# Altium PCB Layout.PcbDoc
Units mm, origin at the board's own origin, x right, y up, seen from the top; angles counter-clockwise.
Board outline 60 x 52.5 mm, 4 copper layers (Top Layer, Ground Layer, Power Layer, Bottom Layer), stack 1.591 mm thick; 44 components, 50 nets, 274 pads, 102 vias.
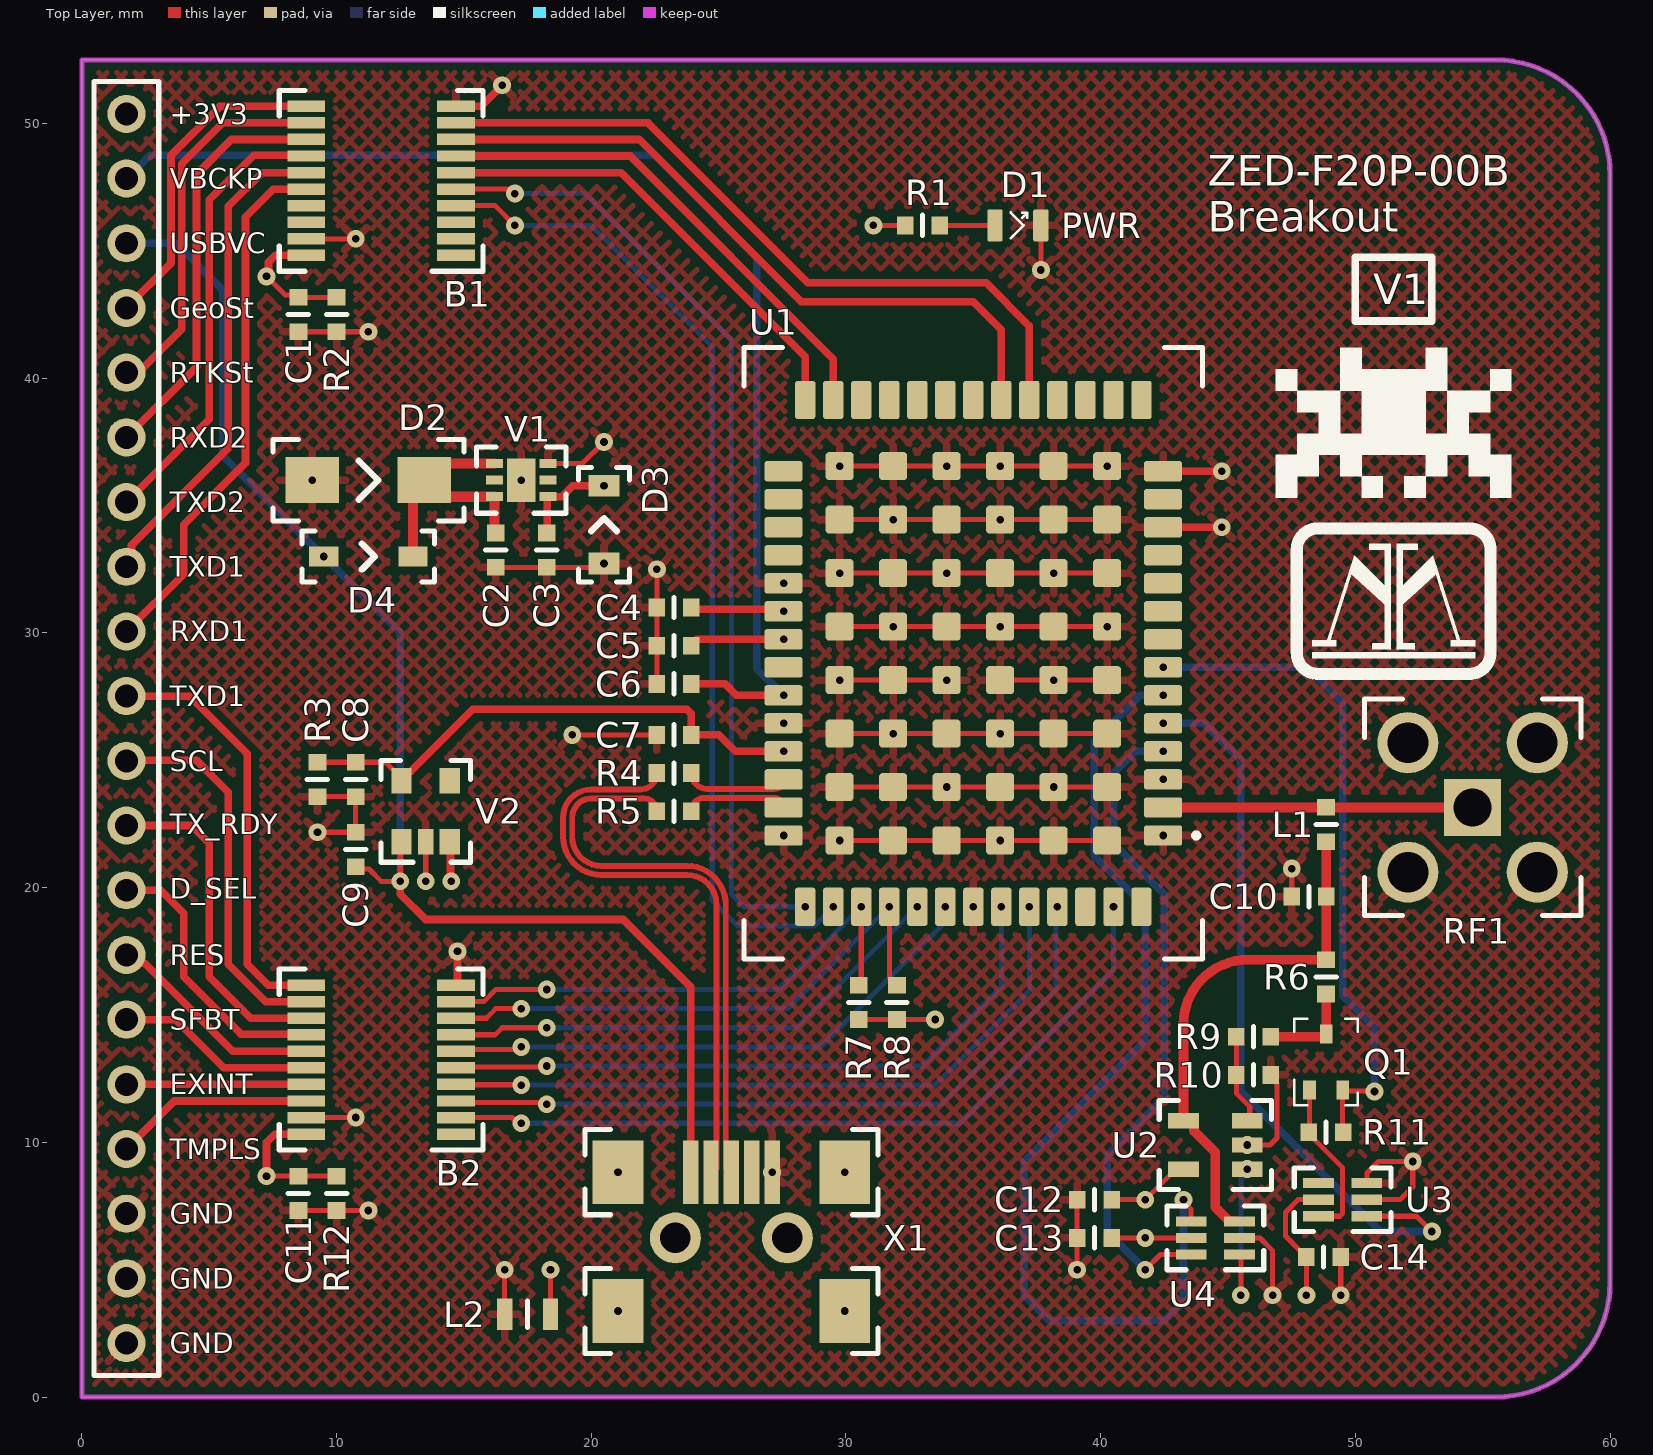
[diagram p0: Top Layer view]
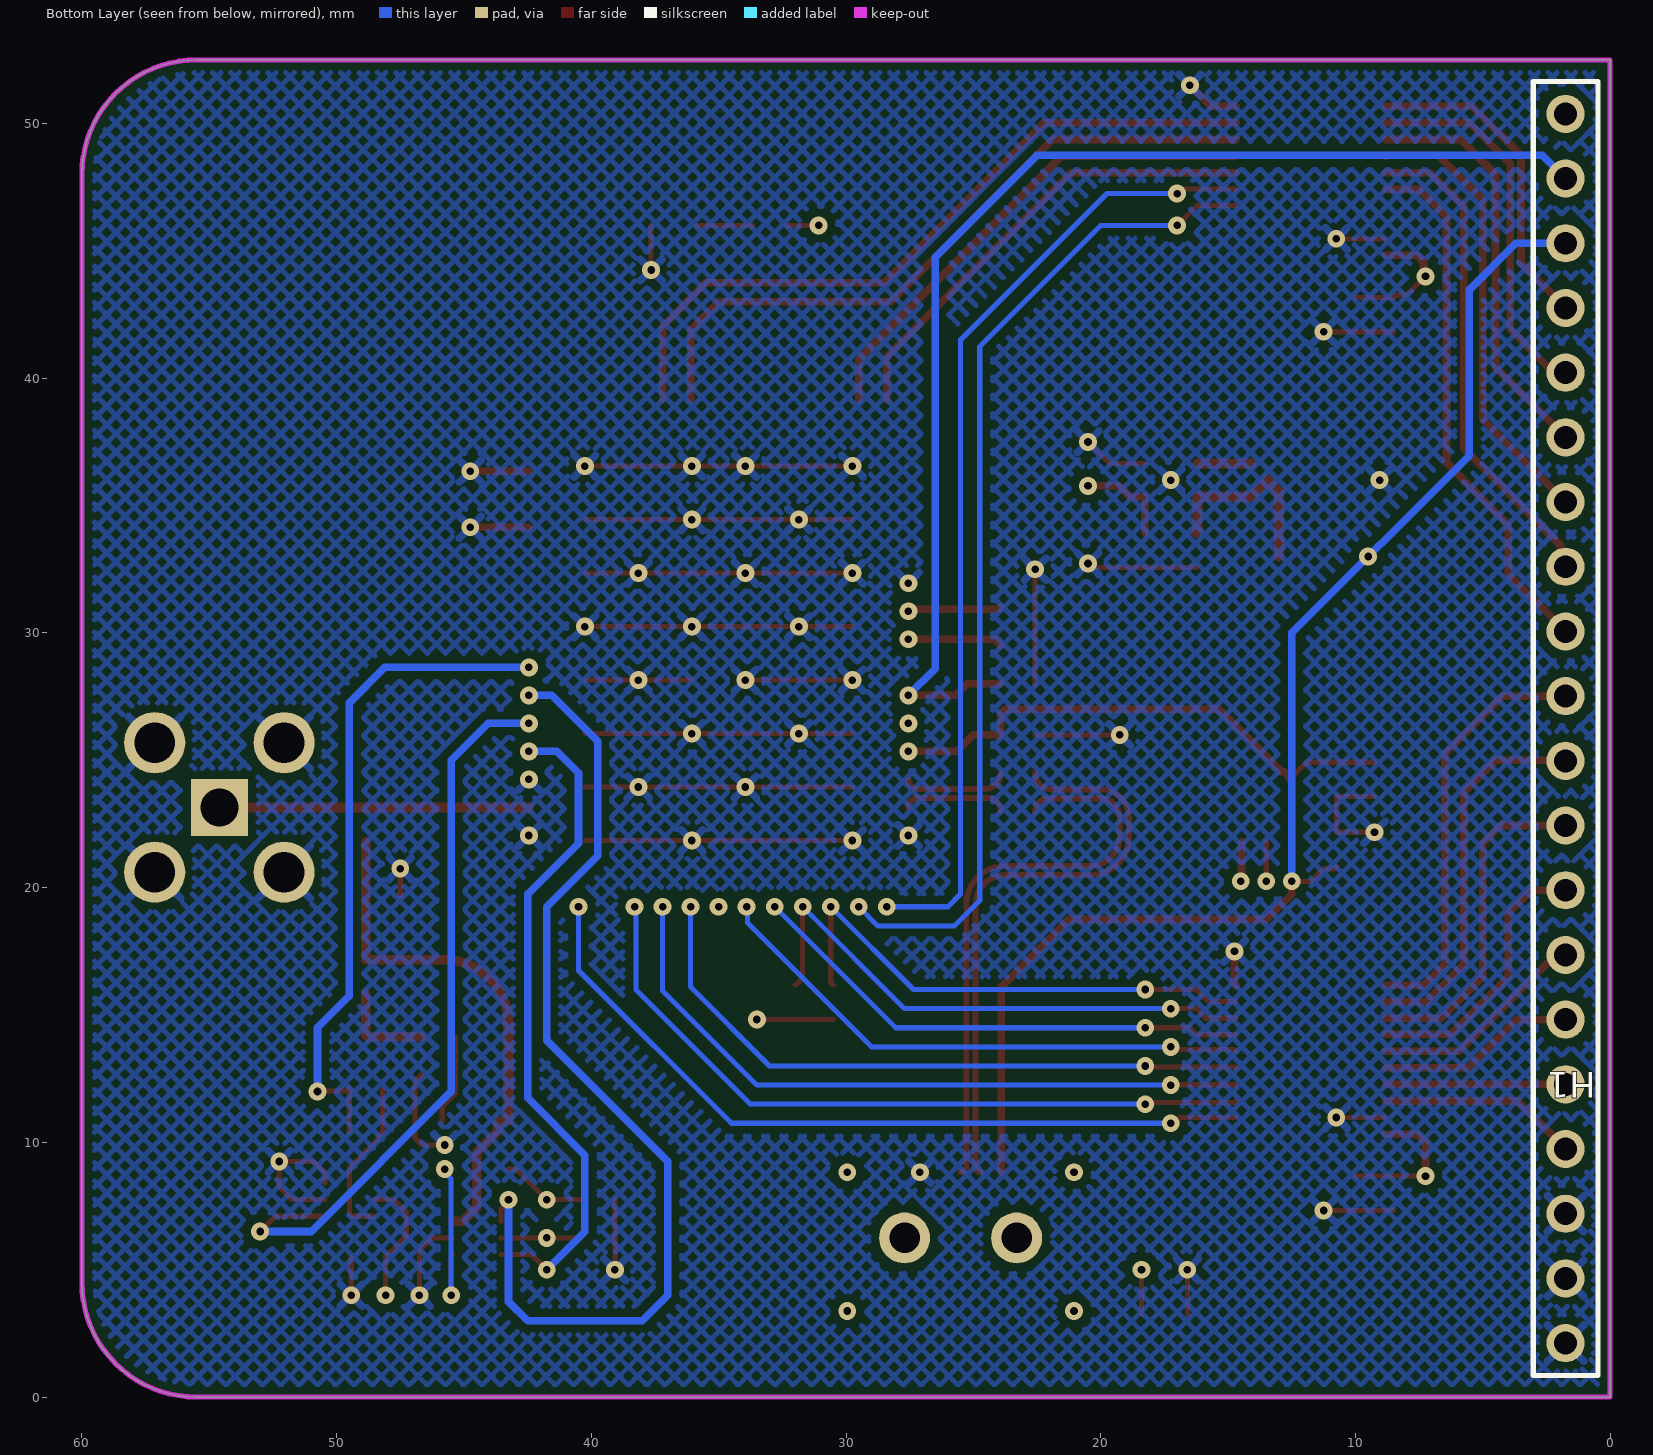
[diagram p1: Bottom Layer view, seen from below]
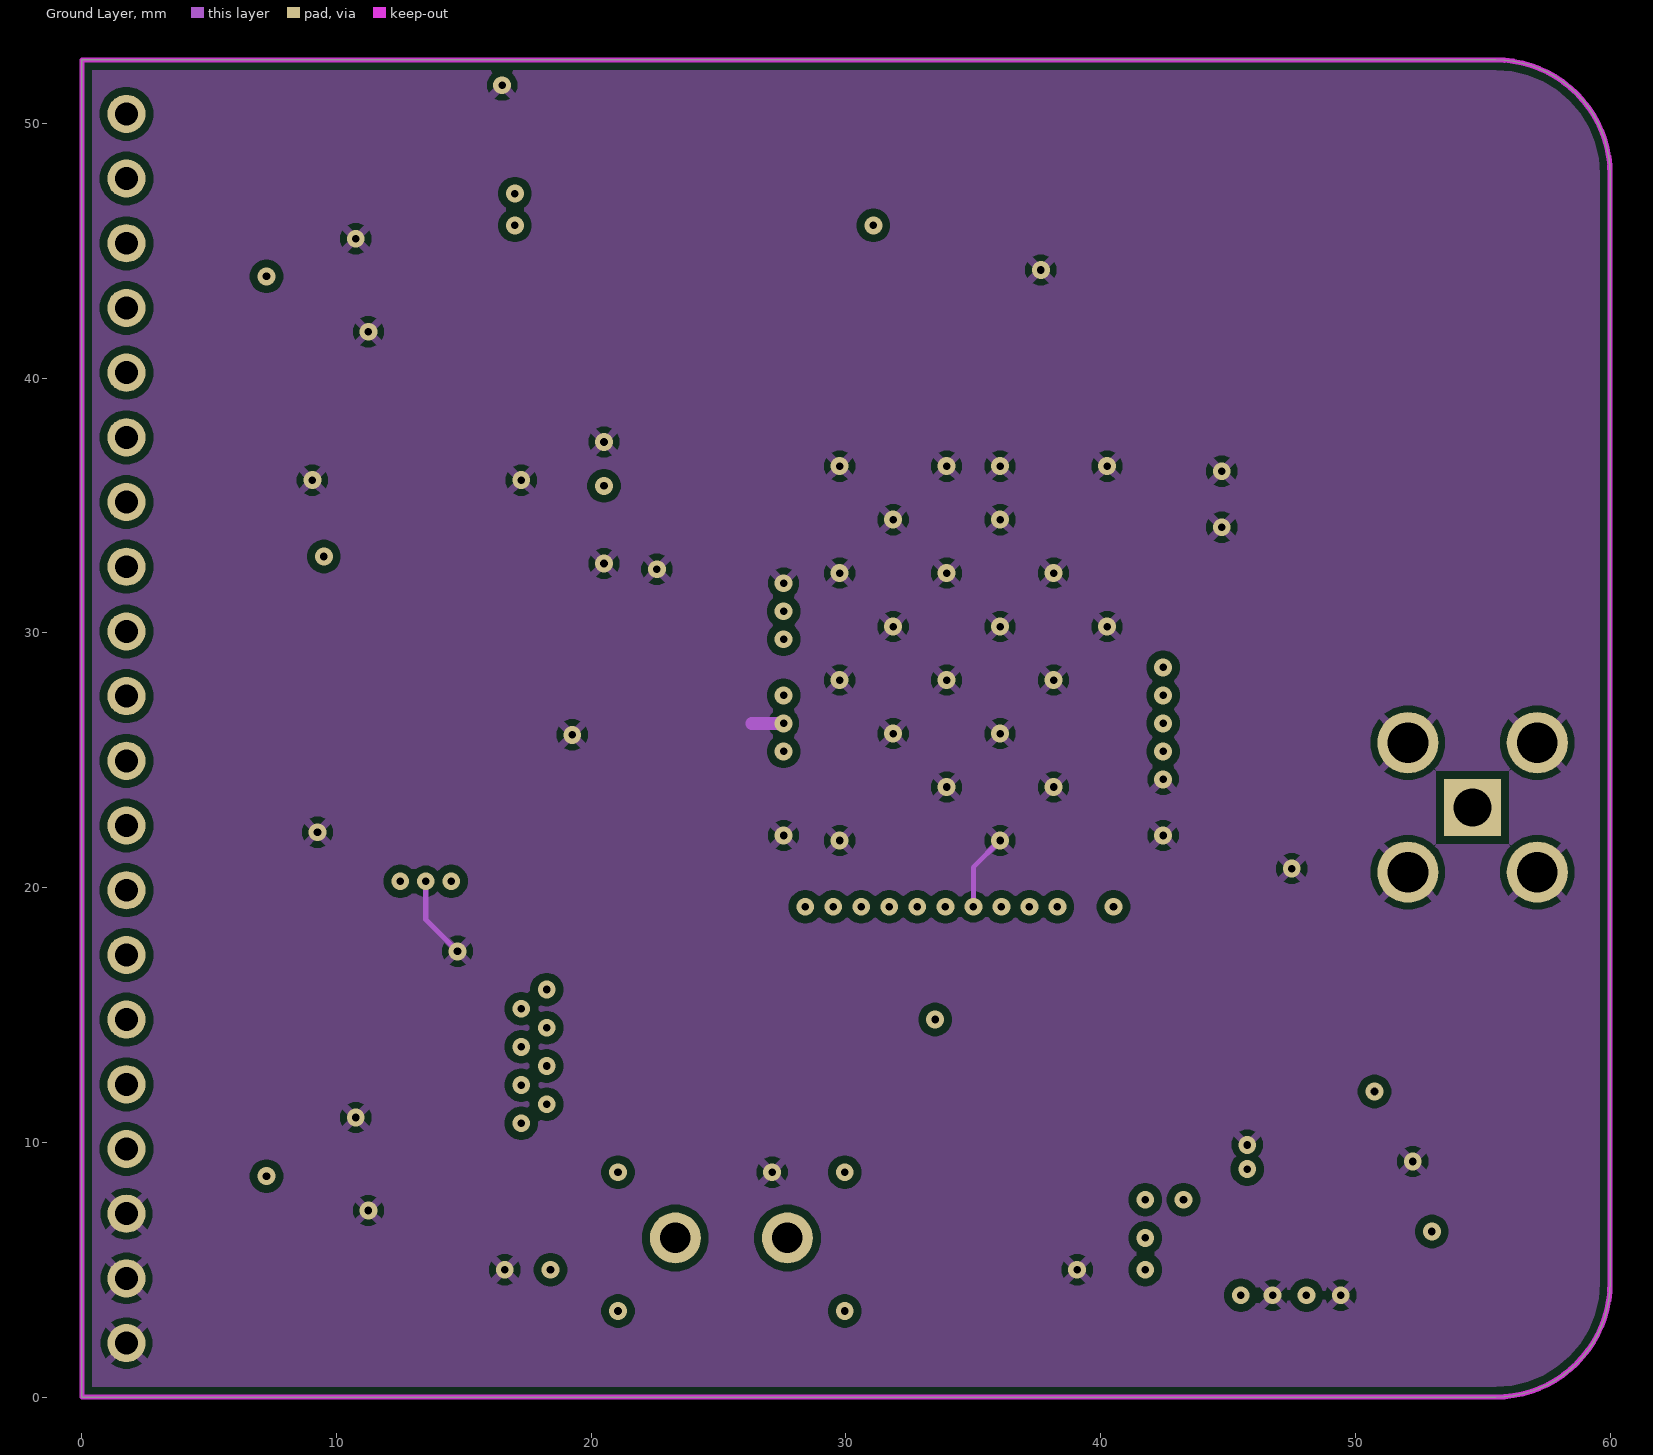
[diagram p2: Ground Layer]
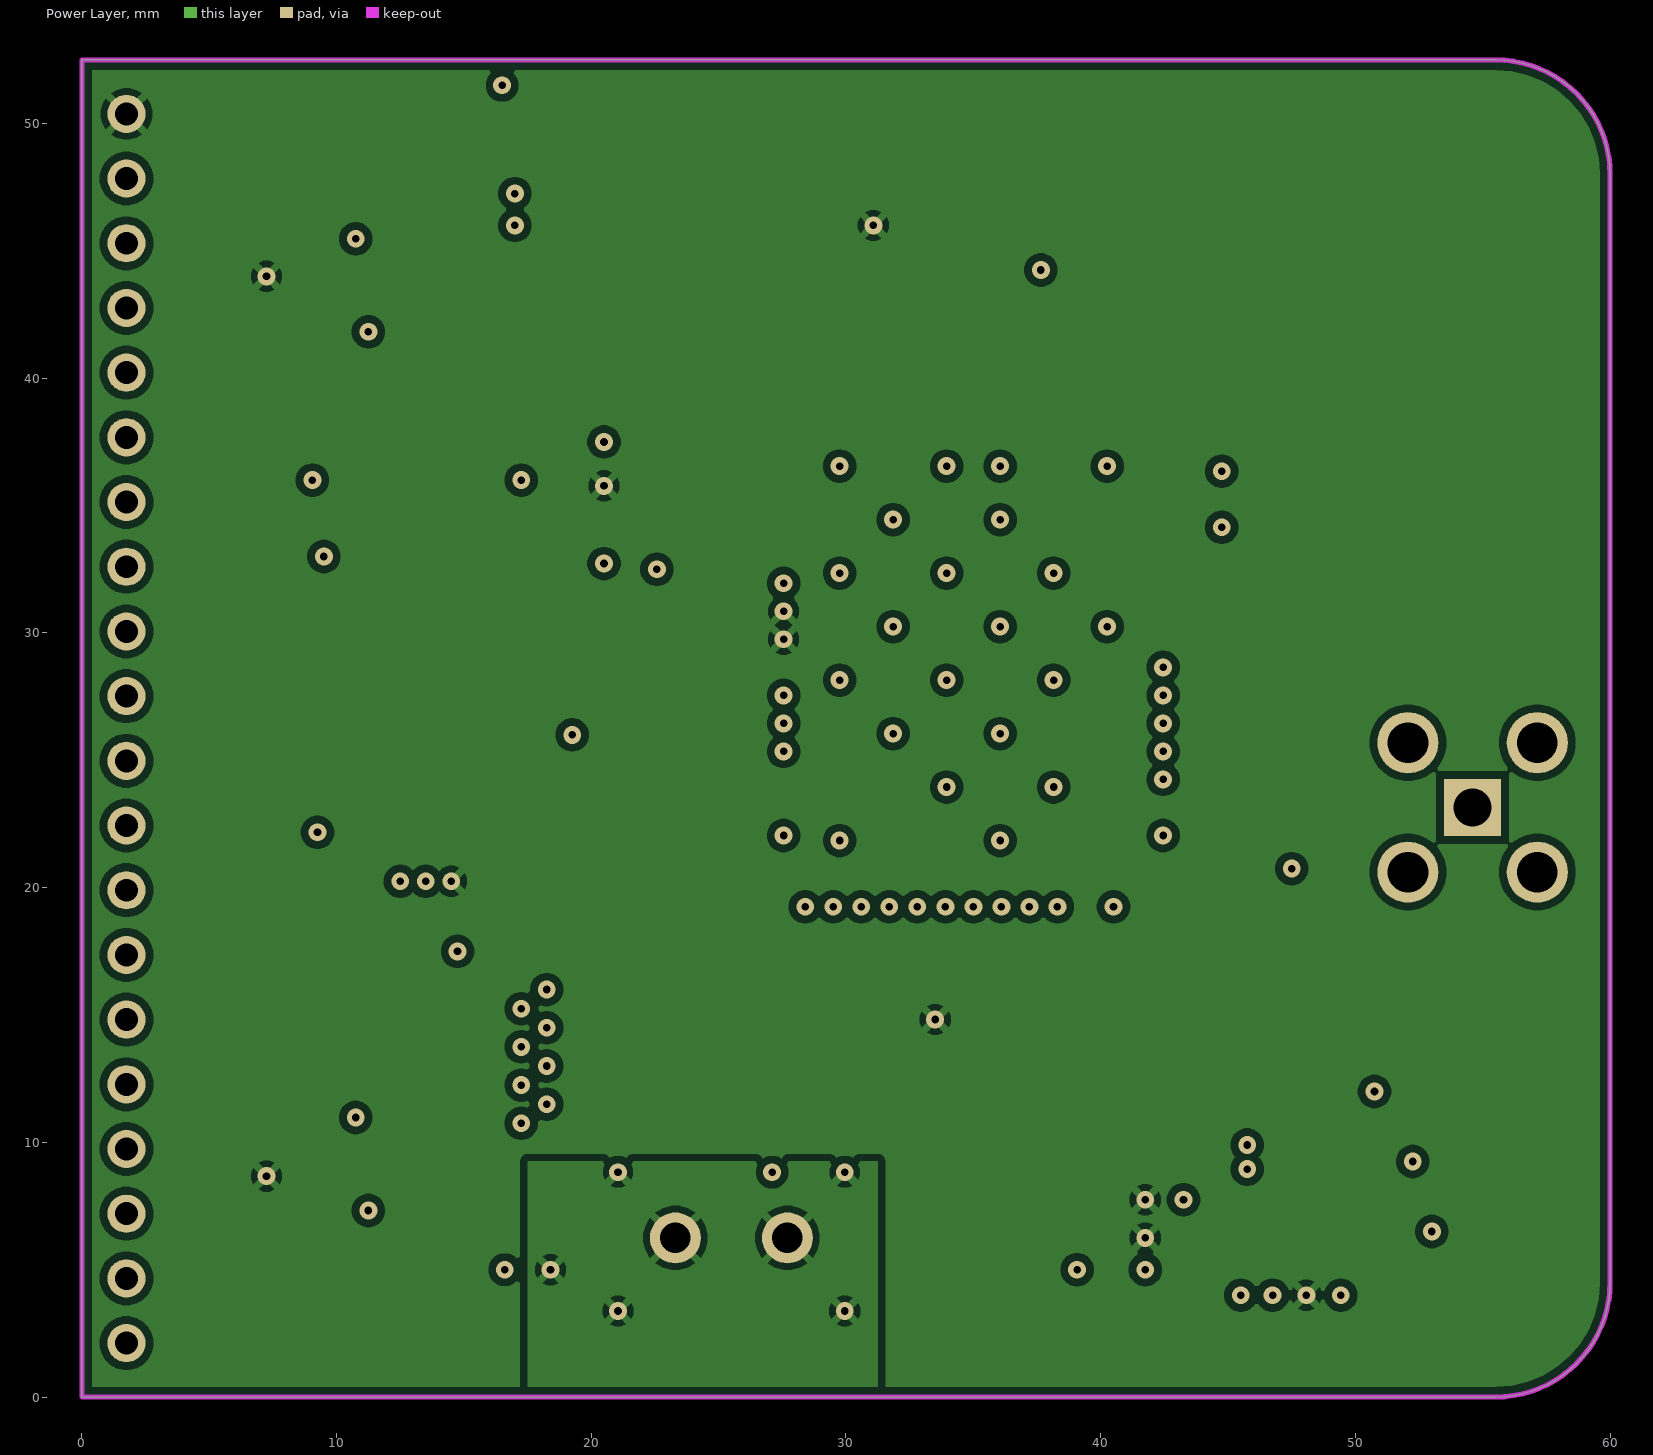
[diagram p3: Power Layer]

## Layer stack, top to bottom
Top Solder: solder mask 0.0102, Solder Resist, Dk 3.8
Top Layer: signal copper 0.035
Dielectric 2: prepreg 0.2104, 7628*1, Dk 4.4
Ground Layer: signal copper 0.0175
Dielectric 1: dielectric 1.065, FR-4, Dk 4.8
Power Layer: signal copper 0.0175
Dielectric 3: prepreg 0.2104, 7628*1, Dk 4.4
Bottom Layer: signal copper 0.035
Bottom Solder: solder mask 0.0102, Solder Resist, Dk 3.8

## Board outline
0,0 55.5,0 ccw(c55.5,4.5) 60,4.5 60,48 ccw(c55.5,48) 55.5,52.5 0,52.5

## Design rules (kind name [scope] priority, off if disabled: settings)
BoardOutlineClearance [All] p1: gap=0.2 ignorepadtopadclearanceinfootprint=FALSE
Clearance "inPolygon Clearance" [InPolygon] p1: gap=0.3 ignorepadtopadclearanceinfootprint=TRUE // this rule ensures that every net within a polygon of a different net has a set clearance from the poly
Clearance "High Current Polygon Clearance" [(InPolygon AND InNetClass('High_Current_Nets'))] p2: gap=0 ignorepadtopadclearanceinfootprint=TRUE // this rule ensures that every net within a polygon of a different net has a set clearance from the poly
Clearance "Different Diff Pair" [All] p3: gap=0.2 ignorepadtopadclearanceinfootprint=TRUE
Clearance "Same Diff Pair" [All] p4: gap=0.1 ignorepadtopadclearanceinfootprint=TRUE
Clearance "Different Nets" [not InAnyDifferentialPair] p5: gap=0.3 ignorepadtopadclearanceinfootprint=TRUE except(0.1: Arc-SMDPad Arc-THPad Arc-Via Arc-Text Track-SMDPad Track-THPad Track-Via Track-Text SMDPad-Text THPad-Text Via-Text Fill-Text Poly-Text Region-Text Text-Text; 0.12: Arc-Arc Arc-Track Track-Track; 0.15: SMDPad-SMDPad SMDPad-THPad SMDPad-Via THPad-THPad THPad-Via Via-Via; 0.2: Arc-Hole Track-Hole SMDPad-Hole THPad-Hole Via-Hole Fill-Hole Poly-Hole Region-Hole Text-Hole)
Clearance "Same Net" [not InAnyDifferentialPair] p6: gap=0 ignorepadtopadclearanceinfootprint=TRUE except(0.1: THPad-Via; 0.18: Arc-Arc Arc-Track Track-Track)
ComponentClearance [All] p1: gap=0.102 collisioncheckmode=3 verticalgap=0.102 showdistances=TRUE
DiffPairsRouting "Ethernet Routing" [InDifferentialPairClass('Ethernet_Pairs')] p1: maxlimit=0.25 minlimit=0.2 mostfreqgap=0.25 toplayer_maxgap=0.2 toplayer_prefgap=0.2 toplayer_minwidth=0.25 toplayer_maxwidth=0.25 toplayer_prefwidth=0.25 midlayer1_mingap=0.25 midlayer1_minwidth=0.19 midlayer1_maxwidth=0.19 midlayer1_prefwidth=0.19 midlayer2_mingap=0.25 midlayer2_minwidth=0.19 midlayer2_maxwidth=0.19 midlayer2_prefwidth=0.19 bottomlayer_maxgap=0.2 bottomlayer_prefgap=0.2 bottomlayer_minwidth=0.25 bottomlayer_maxwidth=0.25 bottomlayer_prefwidth=0.25 impedanceprofiledriven=TRUE maxuncoupledlength=12.7
DiffPairsRouting "USB Routing" [InDifferentialPairClass('USB_Pairs')] p2: maxlimit=0.291 minlimit=0.127 mostfreqgap=0.291 toplayer_maxgap=0.127 toplayer_prefgap=0.127 toplayer_minwidth=0.23 toplayer_maxwidth=0.23 toplayer_prefwidth=0.23 midlayer1_mingap=0.291 midlayer1_minwidth=0.25 midlayer1_maxwidth=0.25 midlayer1_prefwidth=0.25 midlayer2_mingap=0.291 midlayer2_minwidth=0.25 midlayer2_maxwidth=0.25 midlayer2_prefwidth=0.25 bottomlayer_maxgap=0.127 bottomlayer_prefgap=0.127 bottomlayer_minwidth=0.23 bottomlayer_maxwidth=0.23 bottomlayer_prefwidth=0.23 maxuncoupledlength=12.7
DiffPairsRouting "CAN Routing" [InDifferentialPairClass('CAN_Pairs')] p3: maxlimit=0.907 minlimit=0.5 mostfreqgap=0.907 toplayer_maxgap=0.5 toplayer_prefgap=0.5 toplayer_minwidth=0.201 toplayer_maxwidth=0.201 toplayer_prefwidth=0.201 midlayer1_mingap=0.907 midlayer1_minwidth=0.155 midlayer1_maxwidth=0.155 midlayer1_prefwidth=0.155 midlayer2_mingap=0.907 midlayer2_minwidth=0.155 midlayer2_maxwidth=0.155 midlayer2_prefwidth=0.155 bottomlayer_maxgap=0.5 bottomlayer_prefgap=0.5 bottomlayer_minwidth=0.201 bottomlayer_maxwidth=0.201 bottomlayer_prefwidth=0.201 impedanceprofiledriven=TRUE maxuncoupledlength=12.7
Height [All] p1: minheight=0 maxheight=1816.048 prefheight=12.7
HoleSize [All] p1: absolutevalues=TRUE maxlimit=6.3 minlimit=0.3 maxpercent=80.000 minpercent=20.000
HoleToHoleClearance [All] p1: gap=0.25 allowstackedmicrovias=FALSE
MatchedLengths "XTAL Nets Matched Delays" [InNetClass('XTAL_Nets')] p1: tolerance=25.4 checknetsindiffpair=FALSE checkdiffpairvsdiffpair=TRUE checkxsignals=TRUE checkothers=TRUE usedelayunits=TRUE delaytolerance=10.000000
MatchedLengths "Diff Pair Matched Delays" [InDifferentialPairClass('Ethernet_Pairs') or InDifferentialPairClass('USB_Pairs') or InDifferentialPairClass('CAN_Pairs')] p2: tolerance=5 checknetsindiffpair=TRUE checkdiffpairvsdiffpair=FALSE checkxsignals=FALSE checkothers=FALSE usedelayunits=TRUE delaytolerance=100.000000 phasematching=TRUE phasedelaytolerance=5.000000 phasedistance=12.7
MinimumAnnularRing [All] p1: minimumring=0.2
MinimumSolderMaskSliver [All] p1: minsoldermaskwidth=0
PlaneClearance "Supply Net Clearance" [InNetClass('Supply_Nets')] p1: clearance=0.5
PlaneClearance "All Nets" [All] p2: clearance=0.3
PolygonConnect "High Current" [InNetClass('High_Current_Nets')] p1: thpad.connectstyle=Relief thpad.reliefconductorwidth=0.4 thpad.reliefentries=4 thpad.polygonreliefangle="90 Angle" thpad.airgapwidth=0.1 thpad.conductorbypadedge=TRUE thpad.mindistance=0.381 thpad.enablemindistance=FALSE smdpad.connectstyle=Direct smdpad.reliefconductorwidth=0.254 smdpad.reliefentries=4 smdpad.polygonreliefangle="90 Angle" smdpad.airgapwidth=0.254 via.connectstyle=Direct via.reliefconductorwidth=0.254 via.reliefentries=4 via.polygonreliefangle="90 Angle" via.airgapwidth=0.254
PolygonConnect "Supply Nets" [InNetClass('Supply_Nets') OR InNetClass('Supply_Net')] p2: connectstyle=Relief reliefconductorwidth=0.3 reliefentries=4 polygonreliefangle="90 Angle" conductorbypadedge=TRUE mindistance=0.381 enablemindistance=FALSE airgapwidth=0.254
PolygonConnect General [All] p3: connectstyle=Relief reliefconductorwidth=0.254 reliefentries=4 polygonreliefangle="90 Angle" airgapwidth=0.254
RoutingVias [All] p1: holewidth=0.2 width=0.35 viastyle="Through Hole" minholewidth=0.15 minwidth=0.3 maxholewidth=6.3 maxwidth=6.55
SilkToSilkClearance [All] p1: silktosilkclearance=0
SilkToSolderMaskClearance [All] p1: minsilkscreentomaskgap=0 clearancetoexposedcopper=TRUE
SolderMaskExpansion [All] p1: expansion=0.075 istentingtop=FALSE
SupplyNets "Schematic Supply Nets_1" [InNet('+3V3')] p1: voltage=0.000
SupplyNets "Schematic Supply Nets_3" [InNet('GND')] p2: voltage=0.000
SupplyNets "Schematic Supply Nets_6" [InNet('Earth')] p3: voltage=0.000
SupplyNets "Schematic Supply Nets_5" [InNet('V_BCKP')] p4: voltage=0.000
SupplyNets "Schematic Supply Nets_4" [InNet('VCC_RF')] p5: voltage=0.000
SupplyNets "Schematic Supply Nets" [InNet('+5V')] p6: voltage=0.000
UnRoutedNet [All] p1: checkbadconnections=TRUE
Width "nRF Width" [InNetClass('nRF Signal')] p1: maxlimit=0.379 minlimit=0.263 preferedwidth=0.379 toplayer_minwidth=0.379 midlayer1_maxwidth=0.263 midlayer1_prefwidth=0.263 midlayer2_maxwidth=0.263 midlayer2_prefwidth=0.263 bottomlayer_minwidth=0.379 minimp=50.000000 maximp=50.000000 favimp=50.000000 checkconnectedcopper=TRUE
Width [All] p2: maxlimit=100 minlimit=0.1 preferedwidth=0.2
20 further rules are at their usual default settings.

## Classes and differential pairs
differential pair class USB_Pairs: USB_D USB_DX
net class Supply_Nets: +3V3 +5V Earth GND USBVCC
net class "nRF Signal": NetC10_2 RF_IN
component class USB: C7 C8 C9 R3 R4 R5 V2 X1
component class Power: C2 C3 D1 D2 D3 D4 R1 V1
component class "PIO Isolation": B1 B2 C1 C11 R2 R12
component class Main: C4 C5 C6 L2 R7 R8 U1
component class "Breakout Connections": H1
component class "Antenna Supervisory Circuit": C10 C12 C13 C14 L1 Q1 R6 R9 R10 R11 RF1 U2 U3 U4
differential pair USB_DX: +USB_DX_P -USB_DX_N
differential pair USB_D: +USB_D_P -USB_D_N

## Components (designator, comment, footprint, x,y, rotation, side; value= is the part's Value field where it differs from the comment)
B1 "[Isolation Buffer] Bus Switch x8" "[Isolation Buffer] Bus Switch x8" 11.75,47.75 r180 top
B2 "[Isolation Buffer] Bus Switch x8" "[Isolation Buffer] Bus Switch x8" 11.75,13.25 r180 top
C1 "[Cap] 0603 0.1uF 10% 50V" "[Cap] SMD 0603" 8.5,42.5 r90 top (schematic designator C14)
C2 "[Cap] 0603 10uF 10% 10V" "[Cap] SMD 0603" 16.25,33.25 r90 top (schematic designator C7)
C3 "[Cap] 0603 10uF 10% 10V" "[Cap] SMD 0603" 18.25,33.25 r90 top (schematic designator C8)
C4 "[Cap] 0603 0.1uF 10% 50V" "[Cap] SMD 0603" 23.25,31 r0 top (schematic designator C1)
C5 "[Cap] 0603 0.1uF 10% 50V" "[Cap] SMD 0603" 23.25,29.5 r0 top (schematic designator C2)
C6 "[Cap] 0603 0.1uF 10% 50V" "[Cap] SMD 0603" 23.25,28 r0 top (schematic designator C3)
C7 "[Cap] 0603 1uF 10% 25V" "[Cap] SMD 0603" 23.25,26 r0 top (schematic designator C5)
C8 "[Cap] 0603 0.1uF 10% 50V" "[Cap] SMD 0603" 10.75,24.25 r90 top (schematic designator C6)
C9 "[Cap] 0603 0.1uF 10% 50V" "[Cap] SMD 0603" 10.75,21.5 r270 top (schematic designator C4)
C10 "[Cap] 0603 0.01uF 10% 50V" "[Cap] SMD 0603" 48.175,19.65 r0 top (schematic designator C9)
C11 "[Cap] 0603 0.1uF 10% 50V" "[Cap] SMD 0603" 8.5,8 r90 top (schematic designator C13)
C12 "[Cap] 0603 0.1uF 10% 50V" "[Cap] SMD 0603" 39.75,7.75 r0 top (schematic designator C11)
C13 "[Cap] 0603 0.1uF 10% 50V" "[Cap] SMD 0603" 39.75,6.25 r0 top (schematic designator C10)
C14 "[Cap] 0603 0.1uF 10% 50V" "[Cap] SMD 0603" 48.75,5.5 r180 top (schematic designator C12)
D1 "[LED] SMD 0805 Green" "[LED] SMD 0805" 36.75,46 r0 top (schematic designator D4)
D2 "DO-214AC" "[Diode] SMD DO-214AC" 11.25,36 r0 top
D3 "SOD-123F" "[Diode] SOD-123F" 20.5,34.25 r90 top
D4 "SOD123" "[Diode] SMD SOD-123" 11.25,33 r0 top (schematic designator D1)
H1 "1x20 Header" "[Header] 1x20 Male" 1.75,26.25 r270 bottom
L1 "[47nH] SMD 0603 90mA" "[Inductor] SMD 0603" 48.85,22.475 r270 top (schematic designator L2)
L2 "652-MH2029-300Y" "[Ferrite] SMD 0805" 17.5,3.25 r180 top (schematic designator L1)
Q1 "[PMOS] SMD 20V 1A 200mOhm" SOT323 48.85,13.15 r90 top
R1 "[220] SMD 0603 5% 1/10W" "[Res] SMD 0603" 33,46 r0 top (schematic designator R6)
R2 "[10k] SMD 0603 1% 1/8W" "[Res] SMD 0603" 10,42.5 r90 top (schematic designator R12)
R3 "[100k] SMD 0603 1% 1/10W" "[Res] SMD 0603" 9.25,24.25 r90 top
R4 "[27] SMD 0603 1% 1/10W" "[Res] SMD 0603" 23.25,24.5 r0 top
R5 "[27] SMD 0603 1% 1/10W" "[Res] SMD 0603" 23.25,23 r0 top
R6 "[10] SMD 0603 5% 1/10W" "[Res] SMD 0603" 48.85,16.5 r90 top (schematic designator R7)
R7 "[1k] SMD 0603 1% 1/10W" "[Res] SMD 0603" 30.5,15.5 r270 top (schematic designator R1)
R8 "[1k] SMD 0603 1% 1/10W" "[Res] SMD 0603" 32,15.5 r270 top (schematic designator R2)
R9 "[560] SMD 0603 5% 1/10W" "[Res] SMD 0603" 46,14.15 r0 top
R10 "[100k] SMD 0603 1% 1/10W" "[Res] SMD 0603" 46,12.65 r180 top
R11 "[100k] SMD 0603 1% 1/10W" "[Res] SMD 0603" 48.85,10.4 r0 top (schematic designator R8)
R12 "[10k] SMD 0603 1% 1/8W" "[Res] SMD 0603" 10,8 r90 top (schematic designator R11)
RF1 "[SMA] 90deg Thru-Hole" "[SMA] 90deg Thru-Hole" 54.6,23.15 r180 top
U1 "High-Precision Triple Band GNSS Module" "[GNSS] ZED-F20P-00B" 35,29.2 r90 top
U2 "[Op-Amp] Rail-to-Rail Vmax=16V GBP=3kHz" "[Op-Amp] Rail-to-Rail Vmax=16V GBP=3kHz" 44.5,9.9 r180 top (schematic designator U3)
U3 "[Buffer] Dual Open Drain" "[Buffer] Dual Open Drain" 49.5,7.75 r180 top (schematic designator U2)
U4 "[Buffer] Dual Open Drain" "[Buffer] Dual Open Drain" 44.5,6.25 r180 top
V1 "3V3 500mA" "[Linear] 3V3 0.5A" 17.25,36 r180 top (schematic designator V2)
V2 "3V3 200mA" "[Linear] 3V3 0.2A" 13.5,23 r0 top (schematic designator V1)
X1 "[USB] Type-B Mini" "[USB] Type-B Mini" 25.5,5 r0 top

## Footprints (in the part's own frame and the unit in brackets; to place one, negate y for a bottom-side part, rotate by r counter-clockwise, add the part's x,y. Pads: shape width x height; smd on the part's side, far side on the other; paste and mask are expansions set on the pad)
"[Buffer] Dual Open Drain" [mm] "NC7WZ07P6X"
  rect 1.2x0.4 smd: 1(-0.95,0.65) 2(-0.95,0) 3(-0.95,-0.65) 4(0.95,-0.65) 5(0.95,0) 6(0.95,0.65)
  silkscreen extent -1.9,-1.25 1.9,1.25, body extent -1.05,-1 1.05,1, height 1.1
"[Cap] SMD 0603" [mm]
  rect 0.65x0.7 smd: 1(-0.675,0) 2(0.675,0)
  silkscreen extent 0,-0.4 0,0.4, body extent -0.8,-0.45 0.8,0.45, height 0.8
"[Diode] SMD DO-214AC" [mm]
  rect 2.1x1.8 smd: 1(2.2,0) 2(-2.2,0)
  silkscreen extent -3.75,-1.6 3.75,1.6, body extent -3.07,-1.33 3.07,1.33, height 2.39
"[Diode] SMD SOD-123" [mm]
  rect 1.15x0.8 smd: 1(1.75,0) 2(-1.75,0)
  silkscreen extent -2.6,-1 2.6,1, body extent -1.85,-0.8 1.86,0.8, height 1.35
"[Diode] SOD-123F" [mm]
  rect 0.85x1.2 smd: 1(1.525,0) 2(-1.525,0)
  silkscreen extent -2.25,-1 2.25,1, body extent -1.75,-0.8 1.75,0.8, height 0.8
"[Ferrite] SMD 0805" [mm]
  rect 0.6x1.25 smd: 1(-0.9,0) 2(0.9,0)
  silkscreen extent 0,-0.53 0,0.53, body extent -1,-0.6 1,0.6, height 1.1
"[GNSS] ZED-F20P-00B" [mm] "ZED-F20P-00B"
  rrect25% 0.8x1.5 smd: 1(-7.15,-7.45) 2(-6.05,-7.45) 3(-4.95,-7.45) 4(-3.85,-7.45) 5(-2.75,-7.45) 6(-1.65,-7.45) 7(-0.55,-7.45) 8(0.55,-7.45) 9(1.65,-7.45) 10(2.75,-7.45) 11(3.85,-7.45) 12(4.95,-7.45) 13(6.05,-7.45) 14(7.15,-7.45) 28(7.15,7.45) 29(6.05,7.45) 30(4.95,7.45) 31(3.85,7.45) 32(2.75,7.45) 33(1.65,7.45) 34(0.55,7.45) 35(-0.55,7.45) 36(-1.65,7.45) 37(-2.75,7.45) 38(-3.85,7.45) 39(-4.95,7.45) 40(-6.05,7.45) 41(-7.15,7.45)
  rrect25% 1.5x0.8 smd: 15(9.95,-6.6) 16(9.95,-5.5) 17(9.95,-4.4) 18(9.95,-3.3) 19(9.95,-2.2) 20(9.95,-1.1) 21(9.95,0) 22(9.95,1.1) 23(9.95,2.2) 24(9.95,3.3) 25(9.95,4.4) 26(9.95,5.5) 27(9.95,6.6) 42(-9.95,6.6) 43(-9.95,5.5) 44(-9.95,4.4) 45(-9.95,3.3) 46(-9.95,2.2) 47(-9.95,1.1) 48(-9.95,0) 49(-9.95,-1.1) 50(-9.95,-2.2) 51(-9.95,-3.3) 52(-9.95,-4.4) 53(-9.95,-5.5) 54(-9.95,-6.6)
  rrect25% 1.1x1.1 smd: GND(-7.35,-5.25) GND(-7.35,-3.15) GND(-7.35,-1.05) GND(-7.35,1.05) GND(-7.35,3.15) GND(-7.35,5.25) GND(-5.25,-5.25) GND(-5.25,-3.15) GND(-5.25,-1.05) GND(-5.25,1.05) GND(-5.25,3.15) GND(-5.25,5.25) GND(-3.15,3.15) GND(-3.15,5.25) GND(-3.15,-1.05) GND(-3.15,1.05) GND(-3.15,-5.25) GND(-3.15,-3.15) GND(-1.05,5.25) GND(-1.05,3.15) GND(-1.05,-1.05) GND(-1.05,1.05) GND(-1.05,-3.15) GND(-1.05,-5.25) GND(1.05,5.25) GND(1.05,3.15) GND(1.05,-1.05) GND(1.05,1.05) GND(1.05,-3.15) GND(1.05,-5.25) GND(3.15,3.15) GND(3.15,5.25) GND(3.15,-1.05) GND(3.15,1.05) GND(3.15,-5.25) GND(3.15,-3.15) GND(5.25,-5.25) GND(5.25,-3.15) GND(5.25,-1.05) GND(5.25,1.05) GND(5.25,3.15) GND(5.25,5.25) GND(7.35,-5.25) GND(7.35,-3.15) GND(7.35,-1.05) GND(7.35,1.05) GND(7.35,3.15) GND(7.35,5.25)
  silkscreen extent -12,-9 12,9, body extent -11.3,-8.5 11.3,8.5, height 2.5
"[Header] 1x20 Male" [mm]
  round 1.5 hole 0.9: 1(-24.13,0) 2(-21.59,0) 3(-19.05,0) 4(-16.51,0) 5(-13.97,0) 6(-11.43,0) 7(-8.89,0) 8(-6.35,0) 9(-3.81,0) 10(-1.27,0) 11(1.27,0) 12(3.81,0) 13(6.35,0) 14(8.89,0) 15(11.43,0) 16(13.97,0) 17(16.51,0) 18(19.05,0) 19(21.59,0) 20(24.13,-0.001)
  silkscreen extent -25.4,-1.27 25.4,1.27, body extent -25.4,-1.27 25.4,1.27, height 9.5
"[Inductor] SMD 0603" [mm]
  rect 0.65x0.7 smd: 1(-0.675,0) 2(0.675,0)
  silkscreen extent 0,-0.4 0,0.4, body extent -0.8,-0.4 0.8,0.4, height 0.95
"[Isolation Buffer] Bus Switch x8" [mm] "SN74CBTLV3245APWR"
  rect 1.475x0.45 smd: 1(-2.938,2.925) 2(-2.938,2.275) 3(-2.938,1.625) 4(-2.938,0.975) 5(-2.938,0.325) 6(-2.938,-0.325) 7(-2.938,-0.975) 8(-2.938,-1.625) 9(-2.938,-2.275) 10(-2.938,-2.925) 11(2.938,-2.925) 12(2.938,-2.275) 13(2.938,-1.625) 14(2.938,-0.975) 15(2.938,-0.325) 16(2.938,0.325) 17(2.938,0.975) 18(2.938,1.625) 19(2.938,2.275) 20(2.938,2.925)
  silkscreen extent -4,-3.55 4,3.55, body extent -3.2,-3.25 3.2,3.25, height 1.13
"[LED] SMD 0805" [mm]
  rrect20% 0.6x1.25 smd: 1(-0.9,0) 2(0.9,0)
  silkscreen extent -0.28,-0.51 0.37,0.51, body extent -1,-0.65 1,0.65, height 0.8
"[Linear] 3V3 0.2A" [mm] "TCR2EF33,LM(CT"
  rect 0.8x1 smd: 1(-0.95,-1.2) 3(0.95,-1.2) 4(0.95,1.2) 5(-0.95,1.2)
  rect 0.6x1 smd: 2(0,-1.2)
  silkscreen extent -1.75,-2 1.75,2, body extent -1.45,-1.44 1.45,1.36, height 1.4
"[Linear] 3V3 0.5A" [mm] "NCV8705MT33TCG"
  rect 0.65x0.35 smd: 1(-1.05,0.65) 2(-1.05,0) 3(-1.05,-0.65) 4(1.05,-0.65) 5(1.05,0) 6(1.05,0.65)
  rect 1.1x1.7 smd: 7(0,0)
  silkscreen extent -1.75,-1.3 1.75,1.3, body extent -1.05,-1 1.05,1, height 0.8
"[Op-Amp] Rail-to-Rail Vmax=16V GBP=3kHz" [mm] "LT6003CS5#TRMPBF"
  rect 1.2x0.6 smd: 1(-1.25,0.95) 2(-1.25,0) 3(-1.25,-0.95) 4(1.25,-0.95) 5(1.25,0.95)
  silkscreen extent -2.2,-1.75 2.2,1.75, body extent -1.4,-1.45 1.4,1.45, height 1.2
"[Res] SMD 0603" [mm]
  rect 0.65x0.7 smd: 1(-0.675,0) 2(0.675,0)
  silkscreen extent 0,-0.4 0,0.4, body extent -0.8,-0.45 0.8,0.45, height 0.8
"[SMA] 90deg Thru-Hole" [mm] "RFPC-SMA27-F"
  rect 2.25x2.25 hole 1.5: 1(0,0)
  round 2.4 hole 1.6: 2(-2.54,2.54) 2(-2.54,-2.54) 2(2.54,2.54) 2(2.54,-2.54)
  silkscreen extent -4.25,-4.25 4.25,4.25, body extent -11.65,-3.5 3.45,3.5, height 10.28
"[USB] Type-B Mini" [mm] "MUSB-05-S-B-SM-A-K-TR"
  rect 0.6x2.5 smd: 1(-1.6,3.83) 2(-0.8,3.83) 3(0,3.83) 4(0.8,3.83) 5(1.6,3.83)
  rect 2x2.5 smd: MH(-4.45,-1.62) MH(-4.45,3.83) MH(4.45,-1.62) MH(4.45,3.83)
  round 2 hole 1.2: MH(-2.2,1.25) MH(2.2,1.25)
  silkscreen extent -5.75,-3.29 5.75,5.5, body extent -5,-4.57 5,4.93, height 4.12
SOT323 [mm]
  rect 0.75x0.5 smd: 1(-1.1,0.65) 2(-1.1,-0.65) 3(1.1,0)
  silkscreen extent -1.7,-1.25 1.7,1.25, body extent -1.05,-1 1.05,1, height 1

## Part data
B1 B2: "SN74CBTLV3245APWR", Supplier Part Number 1=296-9121-1-ND, Supplier 1=DigiKey
C1 C4 C5 C6 C8 C9 C11 C12 C13 C14: "CL10B104KB8NNNC", Capacitance=100nF, Max Voltage=50V, Size Package=0603, Supplier Part Number 1=1276-1000-6-ND, Tolerance=10%, Supplier 1=DigiKey
C2 C3: "CL10A106KP8NNNC", Capacitance=10uF, Max Voltage=10V, Size Package=0603, Supplier Part Number 1=1276-1192-6-ND, Tolerance=10%, Supplier 1=DigiKey
C7: "CL10B105KA8NNNC", Capacitance=1uF, Max Voltage=25V, Size Package=0603, Supplier Part Number 1=1276-1184-1-ND, Tolerance=10%, Supplier 1=DigiKey
C10: "C0603C103K5RACTU", Capacitance=10nF, Max Voltage=50V, Size Package=0603, Supplier Part Number 1=399-C0603C103K5RACTUDKR-ND, Tolerance=10%, Supplier 1=DigiKey
D1: "LG R971-KN-1-0-20-R18", Color=Green, Size Package=0805, Supplier Part Number 1=475-LGR971-KN-1CT-ND, Supplier 1=DigiKey
D2: library part "[Zener] SMD 5.6V 1W 5%", "SMAZ5V6-13-F", Optimal Zener Voltage=5.6V, Supplier Part Number 1=SMAZ5V6-FDICT-ND, Tolerance=5%, Supplier 1=DigiKey, Wattage=1W
D3: library part "[Zener] SMD 3.5V 1W 6%", "KDZVTR3.3B", Optimal Zener Voltage=3.5V, Supplier Part Number 1=846-KDZVTR3.3BCT-ND, Tolerance=6.06%, Supplier 1=DigiKey, Wattage=1W
D4: library part "[Schottky] SMD 40V 1A", "B5819W-TP", Supplier Part Number 1=B5819W-TPMSCT-ND, Supplier 1=DigiKey
H1: library part "[Header] 1x20 Male", "2.54mm pitch"
L1: "AIMC-0603-47NJ-T", Inductance=47nH, Package=0603, Supplier Part Number 1=535-11541-6-ND, Supplier 1=DigiKey
L2: library part "[Ferrite] SMD 0805 3A 30ohm", Res @ Freq="30 @ 100MHz", Size Package=0805, Supplier Part Number 1=MH2029-300YCT-ND, Supplier 1=DigiKey
Q1: "PMF170XP,115", Supplier Part Number 1=1727-1229-6-ND, Supplier 1=DigiKey
R1: "RK73B1JTTD221J", Resistance=220, Size Package=0603, Supplier Part Number 1=2019-RK73B1JTTD221JDKR-ND, Tolerance=5%, Supplier 1=DigiKey, Wattage=1/8W
R2 R12: "RMCF0603FT10K0", Resistance=10k, Size Package=0603, Supplier Part Number 1=RMCF0603FT10K0DKR-ND, Tolerance=1%, Supplier 1=DigiKey, Wattage=1/10W
R3 R10 R11: "RC0603FR-07100KL", Resistance=100k, Size Package=0603, Supplier Part Number 1=311-100KHRDKR-ND, Tolerance=1%, Supplier 1=DigiKey, Wattage=1/10W
R4 R5: "MCT06030C2709FP500", Resistance=27, Size Package=0603, Supplier Part Number 1=749-1631-1-ND, Tolerance=1%, Supplier 1=DigiKey, Wattage=1/10W
R6: "RC0603JR-1310RL", Resistance=10, Size Package=0603, Supplier Part Number 1=13-RC0603JR-1310RLDKR-ND, Tolerance=5%, Supplier 1=DigiKey, Wattage=1/10W
R7 R8: "RMCF0603FT1K00", Resistance=1k, Size Package=0603, Supplier Part Number 1=RMCF0603FT1K00DKR-ND, Tolerance=1%, Supplier 1=DigiKey, Wattage=1/10W
R9: "RC0603JR-07560RL", Resistance=560, Size Package=0603, Supplier Part Number 1=311-560GRDKR-ND, Tolerance=5%, Supplier 1=DigiKey, Wattage=1/10W
RF1: "RFPC-SMA27-F", Supplier Part Number 1=2073-RFPC-SMA27-F-ND, Supplier 1=DigiKey
U1: library part "[GNSS] ZED-F20P-00B", "ZED-F20P-00B", Supplier Part Number 1=672-ZED-F20P-00BDKR-ND, Supplier 1=DigiKey
U2: "LT6003CS5#TRMPBF", Supplier Part Number 1=505-LT6003CS5#TRMPBFCT-ND, Supplier 1=DigiKey
U3 U4: "NC7WZ07P6X", Supplier Part Number 1=NC7WZ07P6XDKR-ND, Supplier 1=DigiKey
V1: library part "[Linear] 3V3 0.5A", "NCV8705MT33TCG", Supplier Part Number 1=NCV8705MT33TCGOSDKR-ND, Supplier 1=DigiKey
V2: library part "[Linear] 3V3 0.2A", "TCR2EF33,LM(CT", Supplier Part Number 1=TCR2EF33LM(CTDKR-ND, Supplier 1=DigiKey
X1: "MUSB-05-S-B-SM-A-K-TR", Supplier Part Number 1=SAM14226CT-ND, Supplier 1=DigiKey

## Via types
v1: diameter 0.7, hole 0.3, Top Layer to Bottom Layer, 102 vias

## Nets (pads, with @x,y where several pads share a name; then routed paths per layer and width w, separated by ;. In a path a pad name is that pad's centre, name@x,y a point inside that pad or via, vN(x,y) a via of type N, cw(c..) or ccw(c..) an arc to the next point about the centre after c; other vN are vias at no path point)
+3V3: B1.20 B2.20 C1.2 C3.2 C4.2 C5.2 C11.2 C12.2 C13.2 C14.2 D3.1 H1.1 R1.1 R2.2 R7.2 R8.2 R12.2 U1.33 U1.34 U2.5 U3.5 U4.5 V1.1 V2.3 | length 39.7
  Top Layer w0.2: v1(7.25,8.675) R12.2 ; v1(7.25,44) 7.981,43.269 8.406,43.269 C1.2 ; C1.2@8.475,43.175 R2.2 ; R7.2 R8.2 v1(33.5,14.825) ; v1(31.075,46) R1.1 ; C13.2 v1(41.75,6.25) U4.5 ; C12.2 v1(41.75,7.75) 42.95,8.95 U2.5 ; v1(48.075,4) 48.075,5.525 47.85,5.75 47.825,5.75 47.25,6.325 47.25,7.25 47.75,7.75 U3.5
  Top Layer w0.3: v1(7.25,8.675) 7.25,10 7.575,10.325 B2.20 ; v1(7.25,44) 7.327,44.077 7.327,44.553 7.599,44.825 B1.20 ; V2.3 14.475,21.775 14.475,20.275 v1(14.5,20.25) ; C3.2 18.275,33.95 18.275,35.325 V1.1 18.85,35.35 19.275,35.775 v1(20.5,35.775) ; C5.2 23.925,29.525 24.15,29.75 v1(27.55,29.75) ; C4.2 24,30.925 27.475,30.925 v1(27.55,30.85)
+5V: C2.2 D2.1 D4.1 V1.4 V1.6 | length 9.8
  Top Layer w0.4: D4.1 13,35.55 D2.1 14.1,35.35 V1.6 16.2,33.975 C2.2 ; D2.1@14.1,36.65 V1.4
\ANT_OFF: U1.5 U3.1 | length 29.2
  Top Layer w0.2: U3.1 52.4,7.1 v1(53,6.5)
  Bottom Layer w0.3: v1(42.45,26.45) 44.05,26.45 45.5,25 45.5,12 51,6.5 v1(53,6.5)
\ANT_Short: U1.6 U4.4 | length 39.9
  Top Layer w0.2: v1(43.25,7.75) 43.25,7.68 43.55,7.38 U4.4
  Bottom Layer w0.3: v1(42.45,27.55) 41.55,27.55 39.75,25.75 39.75,21.25 41.75,19.25 41.75,14 37,9.25 37,4 38,3 42.5,3 43.25,3.75 v1(43.25,7.75)
\RESET: B2.5 U1.49 | length 25.9
  Top Layer w0.2: B2.5 14.726,12.963 18.213,12.963 v1(18.25,13)
  Bottom Layer w0.2: v1(18.25,13) 33,13 36.1,16.1 v1(36.1,19.25)
\RESET_buf: B2.15 H1.14 | length 8.6
  Top Layer w0.3: H1.14 2.075,17.36 2.403,17.031 2.469,17.031 5.925,13.575 B2.15
\SAFEBOOT: B2.4 U1.50 | length 27.4
  Top Layer w0.2: B2.4 14.701,12.263 17.237,12.263 v1(17.25,12.25)
  Bottom Layer w0.2: v1(17.25,12.25) 33.5,12.25 37.2,15.95 v1(37.2,19.25)
\SAFEBOOT_buf: B2.16 H1.15 | length 7.8
  Top Layer w0.3: H1.15 3.68,14.82 5.575,12.925 B2.16
ANT_Detect: U1.4 U4.6 | length 26.2
  Top Layer w0.2: v1(41.75,5) 42.35,5.6 U4.6
  Bottom Layer w0.3: v1(41.75,5) 40.25,6.5 40.25,9.5 42.5,11.75 42.5,19.75 40.5,21.75 40.5,24.5 41.35,25.35 v1(42.45,25.35)
D_SEL: B2.6 U1.47 | length 21.9
  Top Layer w0.2: B2.6 14.767,13.654 17.154,13.654 v1(17.25,13.75)
  Bottom Layer w0.2: v1(17.25,13.75) 29,13.75 33.87,18.62 33.87,19.22 v1(33.9,19.25)
D_SEL_buf: B2.14 H1.13 | length 10.9
  Top Layer w0.3: H1.13 3.1,19.9 4,19 4,16.5 6.25,14.25 8.787,14.25 B2.14
Earth: L2.1 X1.MH | length 1.7
  Top Layer w0.2: L2.1 v1(18.4,5)
  other v1: 21.05,3.38 29.95,3.38 21.05,8.83 29.95,8.83
EXTINT: B2.3 U1.51 | length 28.7
  Top Layer w0.2: B2.3 14.751,11.563 18.187,11.563 v1(18.25,11.5)
  Bottom Layer w0.2: v1(18.25,11.5) 33.75,11.5 38.25,16 38.25,19.2 v1(38.3,19.25)
EXTINT_buf: B2.17 H1.16 | length 7.1
  Top Layer w0.3: H1.16 1.753,12.278 8.809,12.278 B2.17
GEOFENCE_STAT: B1.9 U1.19 | length 28.7
  Top Layer w0.3: B1.9 22.225,50.025 28.5,43.75 35.5,43.75 37.2,42.05 U1.19
GEOFENCE_STAT_buf: B1.11 H1.4 | length 12.8
  Top Layer w0.3: H1.4 3.5,44.51 3.5,48.75 5.425,50.675 B1.11
GND: B1.10 B1.19 B2.10 B2.19 C1.1 C2.1 C3.1 C4.1 C5.1 C6.1 C7.1 C8.1 C9.1 C10.1 C11.1 C12.1 C13.1 C14.1 D1.2 D2.2 D3.2 H1.18 H1.19 H1.20 L2.2 R2.1 R3.1 R10.1 R12.1 RF1.2 U1.1 U1.3 U1.12 U1.14 U1.32 U1.37 U1.41 U1.48 U1.GND U2.2 U3.2 U3.3 U4.2 V1.3 V1.7 V2.2 X1.5 | length 149
  Top Layer w0.2: C11.1 v1(11.25,7.325) ; C1.1 R2.1 v1(11.25,41.825) ; B2.19 v1(10.75,10.975) ; B1.19 v1(10.75,45.475) ; v1(9.25,22.175) C9.1 C8.1 R3.1 ; v1(13.5,20.25) V2.2 ; C2.1 C3.1 20.35,32.575 v1(20.5,32.725) ; L2.2 v1(16.6,5) ; V1.3 19.65,36.65 v1(20.5,37.5) ; v1(19.25,26) C7.1 ; C6.1 C5.1 C4.1 v1(22.575,32.5) ; v1(29.75,21.85) 31.85,21.85 33.95,21.85 v1(36.05,21.85) 38.15,21.85 U1.GND@40.25,21.85 ; U1.GND@29.75,23.95 31.85,23.95 v1(33.95,23.95) 36.05,23.95 v1(38.15,23.95) U1.GND@40.25,23.95 ; U1.GND@29.75,26.05 v1(31.85,26.05) 33.95,26.05 v1(36.05,26.05) 38.15,26.05 U1.GND@40.25,26.05 ; v1(29.75,28.15) 31.85,28.15 v1(33.95,28.15) ; U1.GND@29.75,30.25 v1(31.85,30.25) 33.95,30.25 v1(36.05,30.25) 38.15,30.25 v1(40.25,30.25) ; v1(29.75,32.35) 31.85,32.35 v1(33.95,32.35) 36.05,32.35 v1(38.15,32.35) U1.GND@40.25,32.35 ; U1.GND@29.75,34.45 v1(31.85,34.45) 33.95,34.45 v1(36.05,34.45) 38.15,34.45 U1.GND@40.25,34.45 ; v1(29.75,36.55) 31.85,36.55 v1(33.95,36.55) v1(36.05,36.55) 38.15,36.55 v1(40.25,36.55) ; U1.GND@36.05,28.15 v1(38.15,28.15) U1.GND@40.25,28.15 ; v1(37.65,44.25) D1.2 ; v1(39.075,5) C13.1 C12.1 ; U4.2 46.25,6.25 46.75,5.75 v1(46.75,4) ; v1(45.75,9.9) 46.65,9.9 46.921,10.171 46.921,12.289 46.9,12.31 46.9,12.425 R10.1 ; C10.1 v1(47.5,20.75) ; v1(49.425,4) C14.1 ; U3.2 51.75,7.75 52.25,8.25 v1(52.25,9.25) 50.9,9.25 50.45,8.8 U3.3
  Top Layer w0.3: B2.10 14.75,16.237 v1(14.75,17.5) ; B1.10 15.675,50.675 v1(16.5,51.5) ; U1.12 v1(44.75,34.15) ; U1.14 v1(44.75,36.35)
  Ground Layer w0.2: v1(13.5,20.25) 13.5,18.75 v1(14.75,17.5) ; 26.25,26.5 26.3,26.45 ; v1(35,19.25) 35,20.8 v1(36.05,21.85)
  Ground Layer w0.5: 26.3,26.45 v1(27.55,26.45)
  other v1: 27.1,8.83 27.55,22.05 42.45,22.05 42.45,24.25 27.55,31.95 9.05,36 17.25,36
NetC10_2: C10.2 L1.2 R6.2 U2.4 U4.3 | length 20.7
  Top Layer w0.379: U4.3 45.44,6.91 45.04,6.91 44.5,7.45 44.5,9.6 43.66,10.44 43.66,10.74 43.55,10.85 U2.4 43.25,14.635 cw(c45.79,14.635) 45.79,17.175 R6.2 C10.2 L1.2
NetD1_1: D1.1 R1.2 | length 2.2
  Top Layer w0.2: R1.2 D1.1
NetQ1_1: Q1.1 R11.1 U3.6 | length 6.4
  Top Layer w0.2: Q1.1 48.2,10.425 R11.1 48.4,10.175 48.4,10.1 49.5,9 49.5,7.211 49.389,7.1 U3.6
NetQ1_3: Q1.3 R6.1 R9.2 | length 3.8
  Top Layer w0.379: R9.2 48.79,14.15 48.85,14.21 R6.1
NetR9_1: R9.1 R10.2 U2.3 | length 3.5
  Top Layer w0.2: R9.1 R10.2 45.325,11.925 45.85,11.4 U2.3@45.85,10.85
NetU2_1: U2.1 U4.1 | length 6.7
  Top Layer w0.2: U4.1 45.5,5.55 v1(45.5,4)
  Bottom Layer w0.2: v1(45.5,4) 45.5,8.565 45.75,8.815 v1(45.75,8.95)
RF_IN: L1.1 RF1.1 U1.2 | length 12.2
  Top Layer w0.379: U1.2 L1.1 RF1.1
RTK_STAT: B1.8 U1.20 | length 27.3
  Top Layer w0.3: B1.8 21.875,49.375 28.25,43 35,43 36.1,41.9 U1.20
RTK_STAT_buf: B1.12 H1.5 | length 14.9
  Top Layer w0.3: H1.5 1.979,40.45 2.45,40.45 3.92,41.92 3.92,48.42 5.525,50.025 B1.12
RXD: B1.4 U1.43 | length 39.6
  Top Layer w0.2: B1.4 16.225,46.775 v1(17,46)
  Bottom Layer w0.2: v1(17,46) 20,46 24.75,41.25 24.75,19.5 25.75,18.5 28.75,18.5 v1(29.5,19.25)
RXD2: B1.7 U1.26 | length 19.7
  Top Layer w0.3: B1.7 21.525,48.725 29.5,40.75 U1.26
RXD2_buf: B1.13 H1.6 | length 16.3
  Top Layer w0.3: H1.6 4.5,40.43 4.5,48 5.875,49.375 B1.13
RXD_buf: B1.16 H1.9 | length 21
  Top Layer w0.3: H1.9@1.77,30.08 4,32.31 4,34.25 6.422,36.672 6.422,46.328 7.519,47.425 B1.16
SCL: B2.8 R8.1 U1.45 | length 22
  Top Layer w0.2: B2.8 15.875,14.875 16.25,15.25 v1(17.25,15.25) ; v1(31.7,19.25) 31.7,16.45 31.975,16.175 R8.1
  Bottom Layer w0.2: v1(17.25,15.25) 27.7,15.25 v1(31.7,19.25)
SCL_buf: B2.12 H1.11 | length 14.9
  Top Layer w0.3: H1.11 1.77,25 4.5,25 5.75,23.75 5.75,17 7.225,15.525 B2.12
SDA: B2.9 R7.1 U1.44 | length 20.6
  Top Layer w0.2: B2.9 15.775,15.525 16.25,16 v1(18.25,16) ; R7.1 30.6,16.275 v1(30.6,19.25)
  Bottom Layer w0.2: v1(18.25,16) 27.35,16 v1(30.6,19.25)
SDA_buf: B2.11 H1.10 | length 16.6
  Top Layer w0.3: H1.10 4.23,27.52 6.5,25.25 6.5,17 7.325,16.175 B2.11
TIMEPULSE: B2.2 U1.53 | length 30.9
  Top Layer w0.2: B2.2 16.89,10.975 17.115,10.75 v1(17.25,10.75)
  Bottom Layer w0.2: v1(17.25,10.75) 34.5,10.75 40.5,16.75 v1(40.5,19.25)
TIMEPULSE_buf: B2.18 H1.17 | length 7.8
  Top Layer w0.3: H1.17 3.635,11.625 B2.18
TX_READY: B2.7 U1.46 | length 20.2
  Top Layer w0.2: B2.7 16.225,14.225 16.5,14.5 v1(18.25,14.5)
  Bottom Layer w0.2: v1(18.25,14.5) 28.05,14.5 v1(32.8,19.25)
TX_READY_buf: B2.13 H1.12 | length 13.3
  Top Layer w0.3: H1.12 4.31,22.44 5,21.75 5,16.5 6.625,14.875 B2.13
TXD: B1.5 U1.42 | length 38.2
  Top Layer w0.2: B1.5 16.825,47.425 cw(c16.825,47.25) v1(17,47.25)
  Bottom Layer w0.2: v1(17,47.25) 19.75,47.25 25.5,41.5 25.5,19.75 26,19.25 v1(28.4,19.25)
TXD2: B1.6 U1.27 | length 18.4
  Top Layer w0.3: B1.6 21.175,48.075 28.4,40.85 U1.27
TXD2_buf: B1.14 H1.7 | length 17.8
  Top Layer w0.3: H1.7 5,38.39 5,47 6.75,48.75 8.787,48.75 B1.14
TXD_buf: B1.15 H1.8 | length 19.4
  Top Layer w0.3: H1.8 1.949,32.799 1.949,33.449 5.75,37.25 5.75,46.75 7.075,48.075 B1.15
USB_D_N: R4.1 X1.2 | length 23.6
  Top Layer w0.23: R4.1 cw(c21.932,24.5) 21.932,23.857 20,23.857 ccw(c20,22.75) 18.893,22.75 18.893,22 ccw(c20.393,22) 20.393,20.5 23.75,20.5 cw(c23.75,19.329) 24.921,19.329 24.921,9.051 cw(c24.7,9.051) X1.2
USB_D_P: R5.1 X1.3 | length 23
  Top Layer w0.23: R5.1 ccw(c22.075,23) 22.075,23.5 20,23.5 ccw(c20,22.75) 19.25,22.75 19.25,22 ccw(c20.393,22) 20.393,20.857 23.75,20.857 cw(c23.75,19.329) 25.279,19.329 25.279,9.051 ccw(c25.5,9.051) X1.3
USB_DX_N: R4.2 U1.39 | length 4.2
  Top Layer w0.23: R4.2 ccw(c24.546,24.5) 24.546,23.879 27.179,23.879 ccw(c27.179,24.25) U1.39
USB_DX_P: R5.2 U1.40 | length 4.1
  Top Layer w0.23: R5.2 cw(c24.446,23) 24.446,23.521 27.179,23.521 cw(c27.179,23.15) U1.40
USBVCC: C9.2 D4.2 H1.3 V2.1 X1.1 | length 54.9
  Top Layer w0.2: C9.2 10.844,20.731 11.269,20.731 11.75,20.25 v1(12.5,20.25) 12.5,21.75 V2.1
  Top Layer w0.3: v1(12.5,20.25) 12.5,19.75 13.5,18.75 21.25,18.75 23.9,16.1 X1.1
  Bottom Layer w0.3: H1.3 3.7,45.3 5.536,43.464 5.536,36.964 12.5,30 v1(12.5,20.25)
  other v1: 9.5,33
V_BCKP: C6.2 H1.2 U1.36 | length 48.2
  Top Layer w0.3: C6.2 25.25,28 25.7,27.55 v1(27.55,27.55)
  Bottom Layer w0.3: H1.2 2.66,48.75 22.5,48.75 26.5,44.75 26.5,28.6 v1(27.55,27.55)
V_USB: C7.2 C8.2 R3.2 U1.38 V2.5 | length 20.9
  Top Layer w0.2: R3.2 C8.2 11.925,24.925 V2.5@12.55,24.3
  Top Layer w0.3: V2.5 12.55,24.3 12.8,24.55 12.9,24.55 15.35,27 23.75,27 23.925,26.825 C7.2 25,26 25.65,25.35 v1(27.55,25.35)
VCC_RF: Q1.2 R11.2 U1.7 | length 26.3
  Top Layer w0.2: Q1.2 49.5,10.425 R11.2 ; Q1.2@49.525,12.025 v1@50.725,12.025
  Top Layer w0.3: Q1.2 Q1.2@49.525,12.025
  Bottom Layer w0.3: v1(42.45,28.65) 48.1,28.65 49.5,27.25 49.5,15.75 50.75,14.5 v1(50.75,12)
pads on no net: B1.1 B1.2 B1.3 B1.17 B1.18 B2.1 U1.8 U1.9 U1.10 U1.11 U1.13 U1.15 U1.16 U1.17 U1.18 U1.21 U1.22 U1.23 U1.24 U1.25 U1.28 U1.29 U1.30 U1.31 U1.35 U1.52 U1.54 U3.4 V1.2 V1.5 V2.4 X1.4

## Polygon pours and split planes (outlines as drawn)
+3V3 on Power Layer "+3V3 Power Poly" (solid, remove dead copper, pour order 2): 0,0 0,52.5 60,52.5 60,0
Earth on Power Layer "Earth Power Poly" (solid, remove dead copper, pour order 0): 31.25,9.25 31.25,0 17.5,0 17.5,9.25
GND on Ground Layer "GND Poly" (solid, remove dead copper, pour order 1): 0,0 0,52.5 60,52.5 60,0
GND on Top Layer "Top GND Poly" (hatched 45Degree grid 0.508 track 0.203, remove dead copper, pour order 3): 0,0 0,52.5 60,52.5 60,0
GND on Bottom Layer "Bottom GND Poly" (hatched 45Degree grid 0.508 track 0.203, remove dead copper, pour order 4): 0,0 0,52.5 60,52.5 60,0

## Keep-outs
Keep-Out Layer:
  the board outline again, w0.2

## Silkscreen, mask and mechanical layers (free items; w line width, h text height)
Top Overlay:
  drawing of 13 lines, arcs and shapes, not listed
  text "+3V3" at 3.45,49.98 h0.8
  text "VBCKP" at 3.45,47.44 h0.8
  text "ZED-F20P-00B / Breakout" at 44.202,45.75 h1.2
  text "PWR" at 38.454,45.5 h1
  text "USBVC" at 3.45,44.9 h0.8
  text "V1" at 50.7,42.9 h1.2
  text "GeoSt" at 3.45,42.36 h0.8
  text "RTKSt" at 3.45,39.82 h0.8
  text "RXD2" at 3.45,37.28 h0.8
  text "TXD2" at 3.45,34.74 h0.8
  text "TXD1" at 3.45,32.2 h0.8
  text "RXD1" at 3.47,29.68 h0.8
  text "TXD1" at 3.45,27.12 h0.8
  text "SCL" at 3.45,24.58 h0.8
  text "TX_RDY" at 3.45,22.107 h0.8
  text "D_SEL" at 3.45,19.567 h0.8
  text "RES" at 3.45,16.96 h0.8
  text "SFBT" at 3.45,14.42 h0.8
  text "EXINT" at 3.45,11.88 h0.8
  text "TMPLS" at 3.45,9.34 h0.8
  text "GND" at 3.45,6.8 h0.8
  text "GND" at 3.45,4.26 h0.8
  text "GND" at 3.451,1.72 h0.8